# EAGLE board Powerboard v1 (EAGLE 9.4.2), part 1 of 3
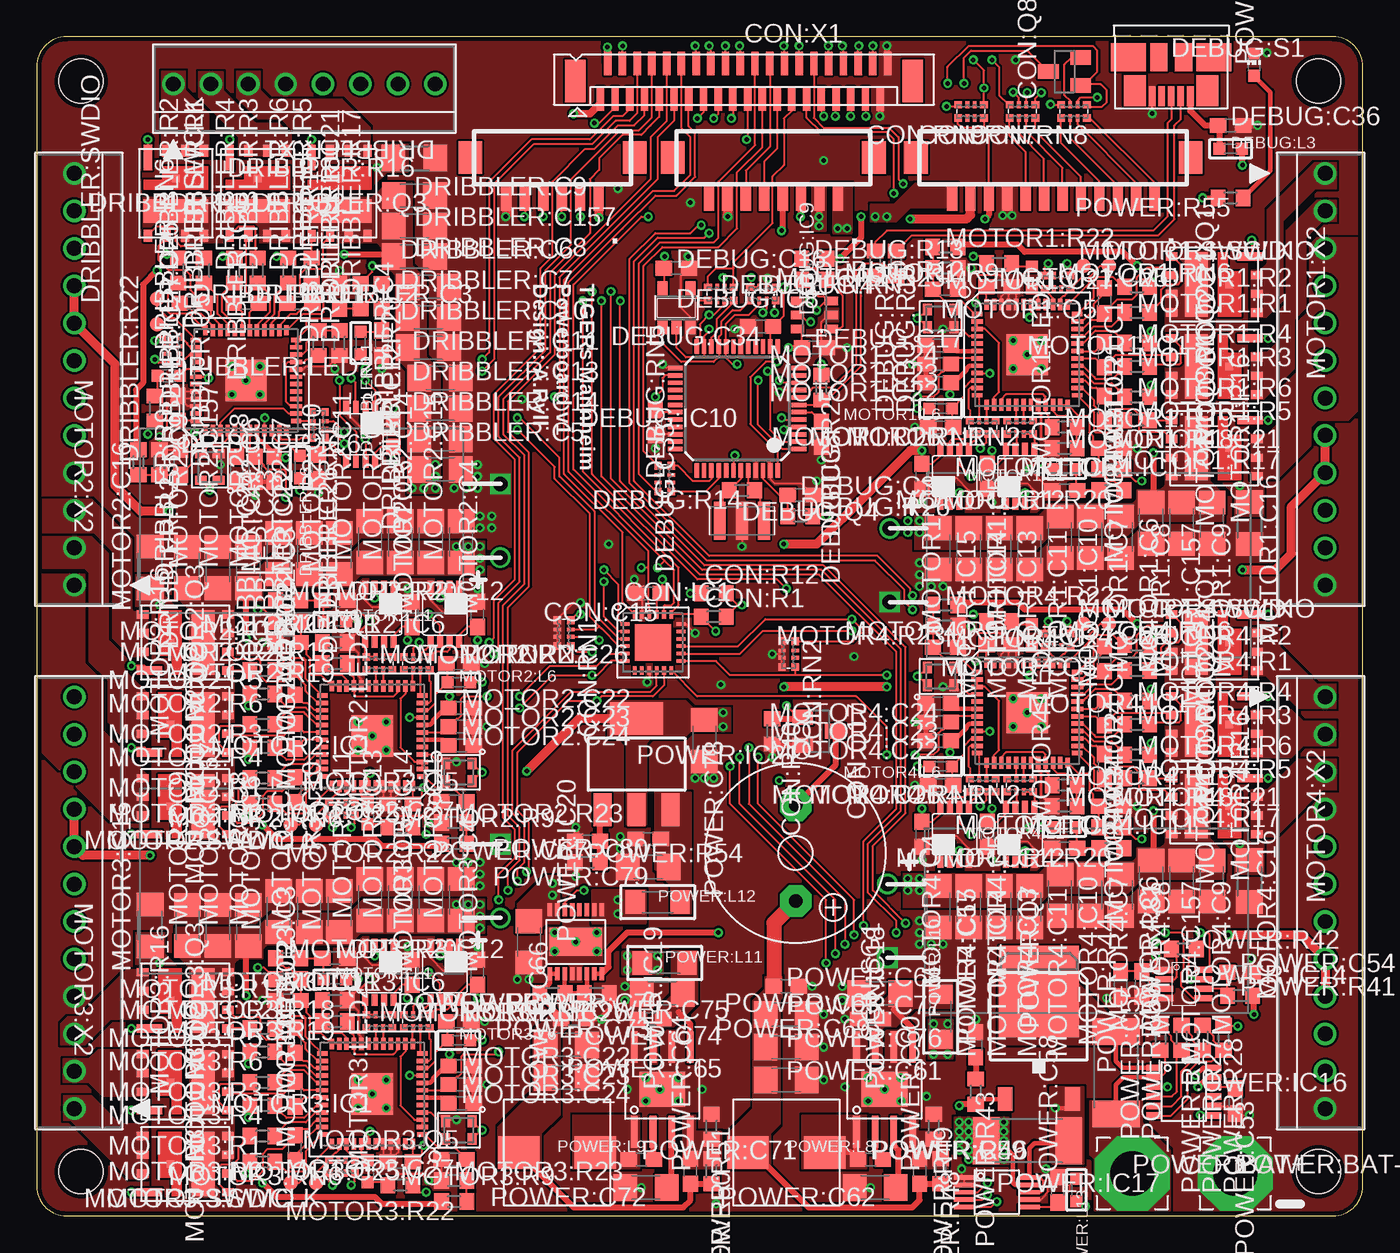
[diagram p0: board, top side]
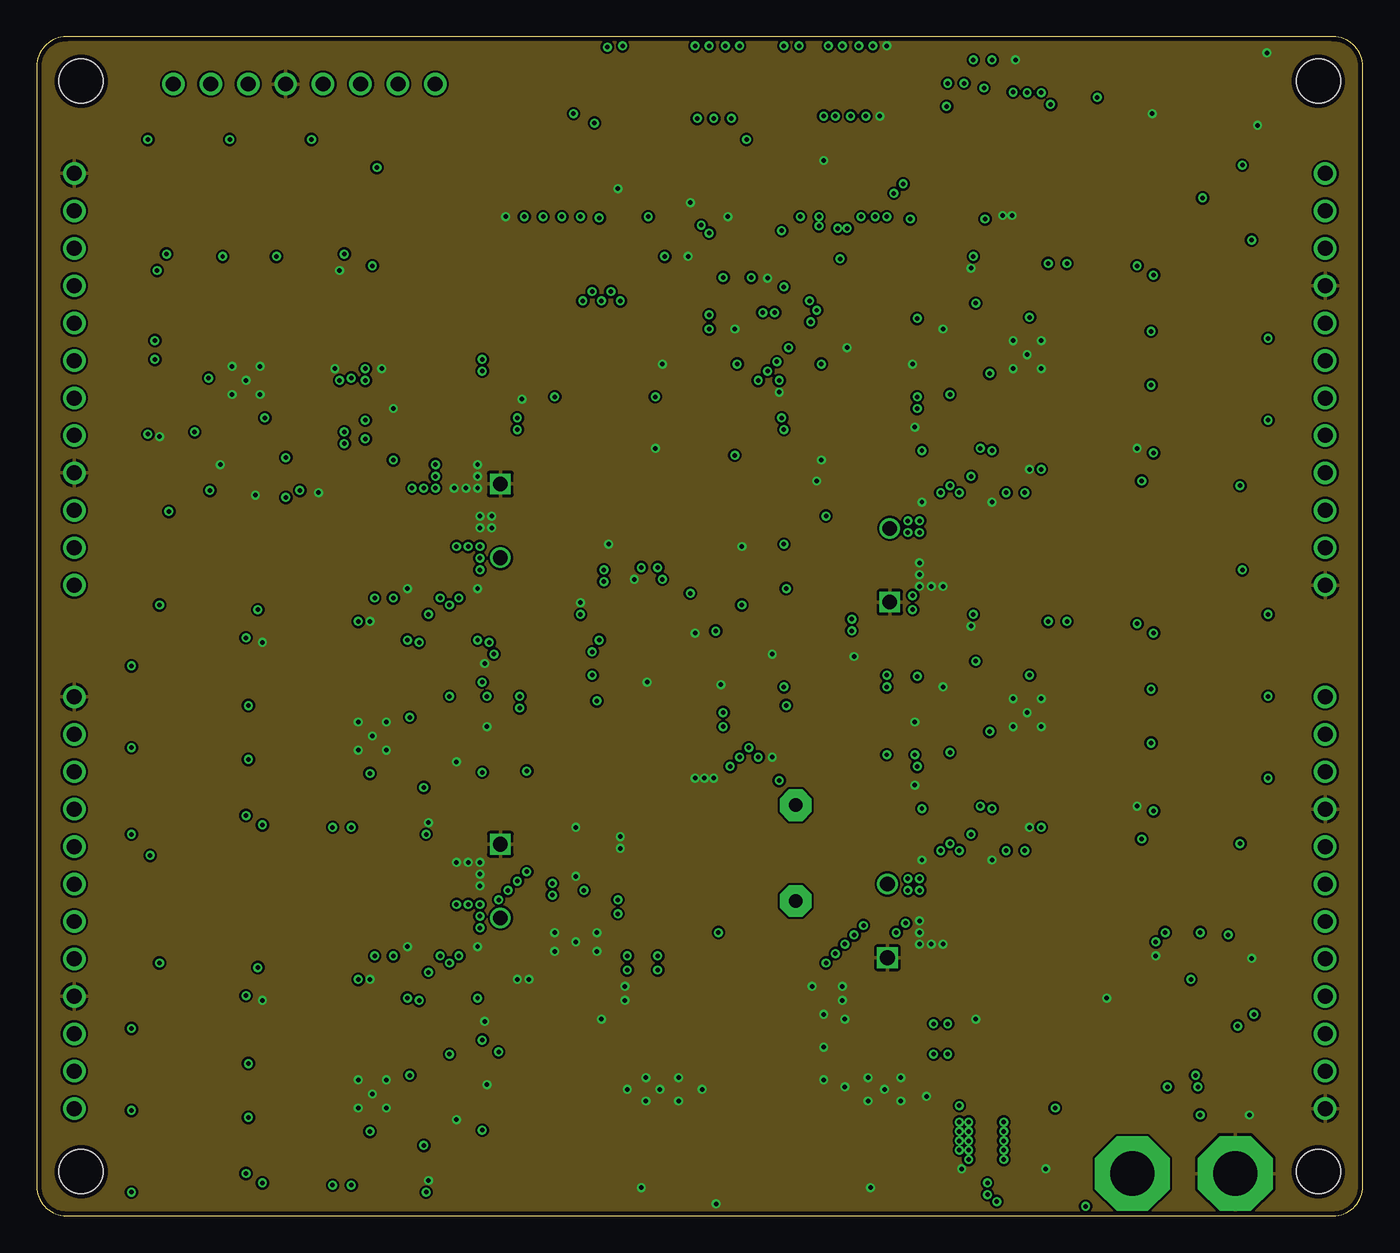
[diagram p1: board, inner layer GND]
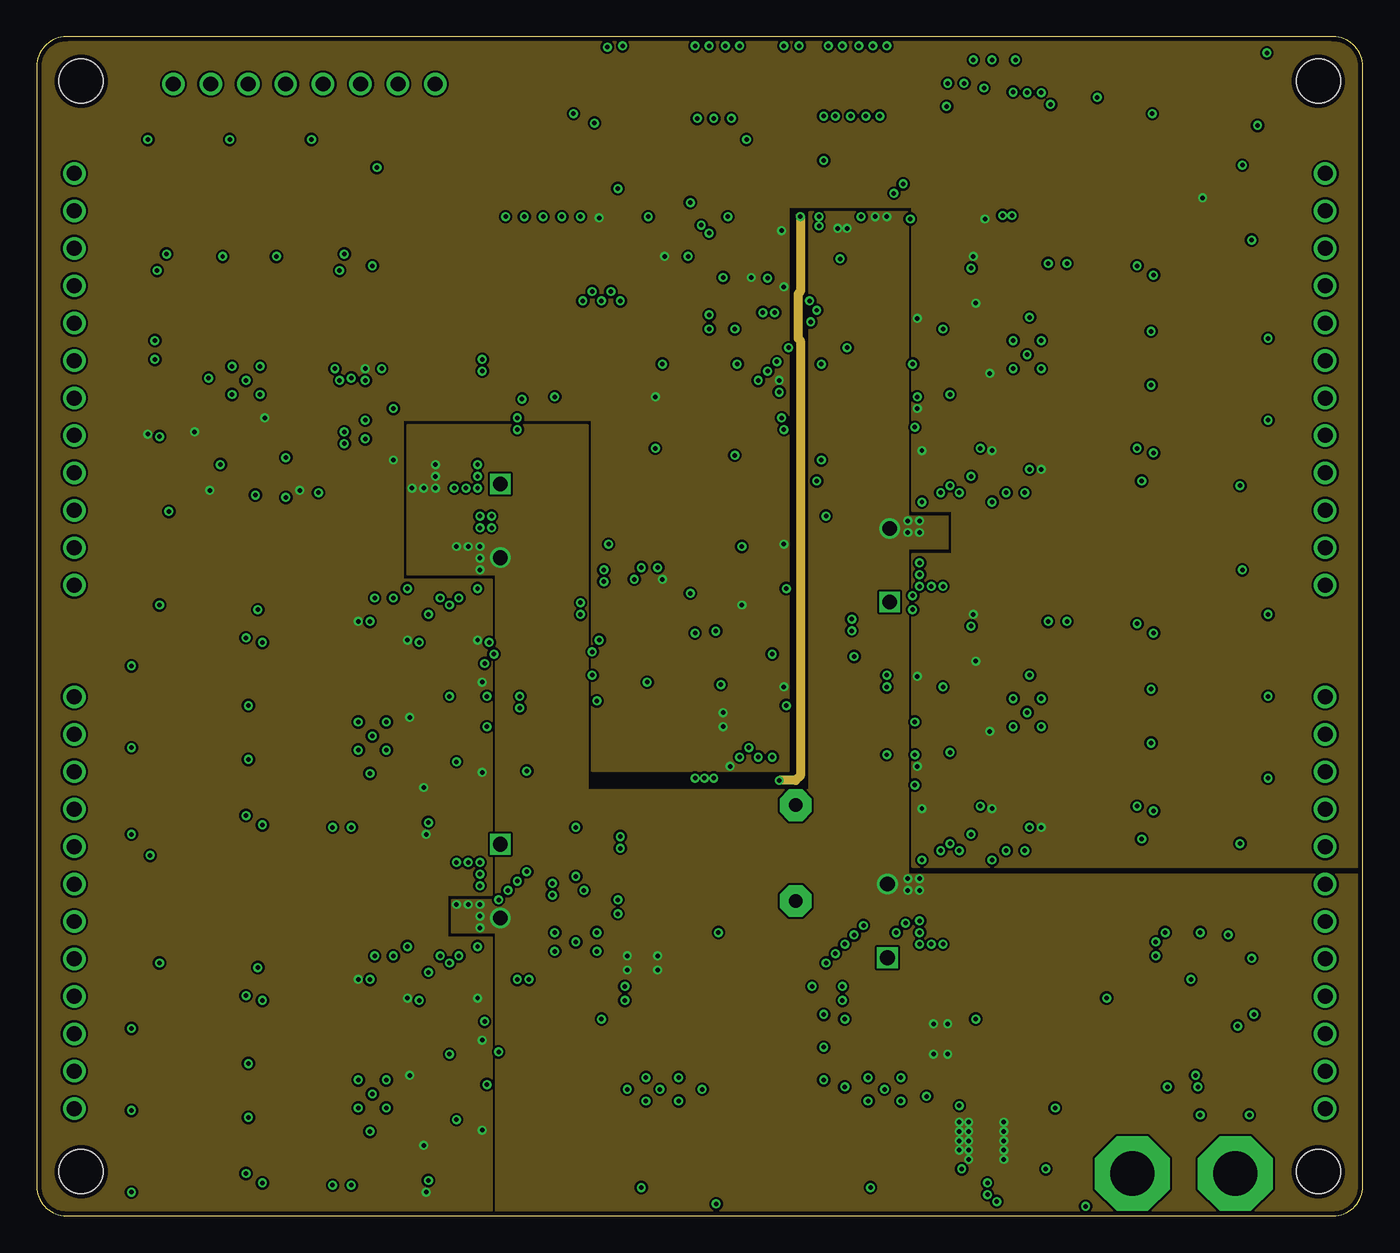
[diagram p2: board, inner layer PWR]
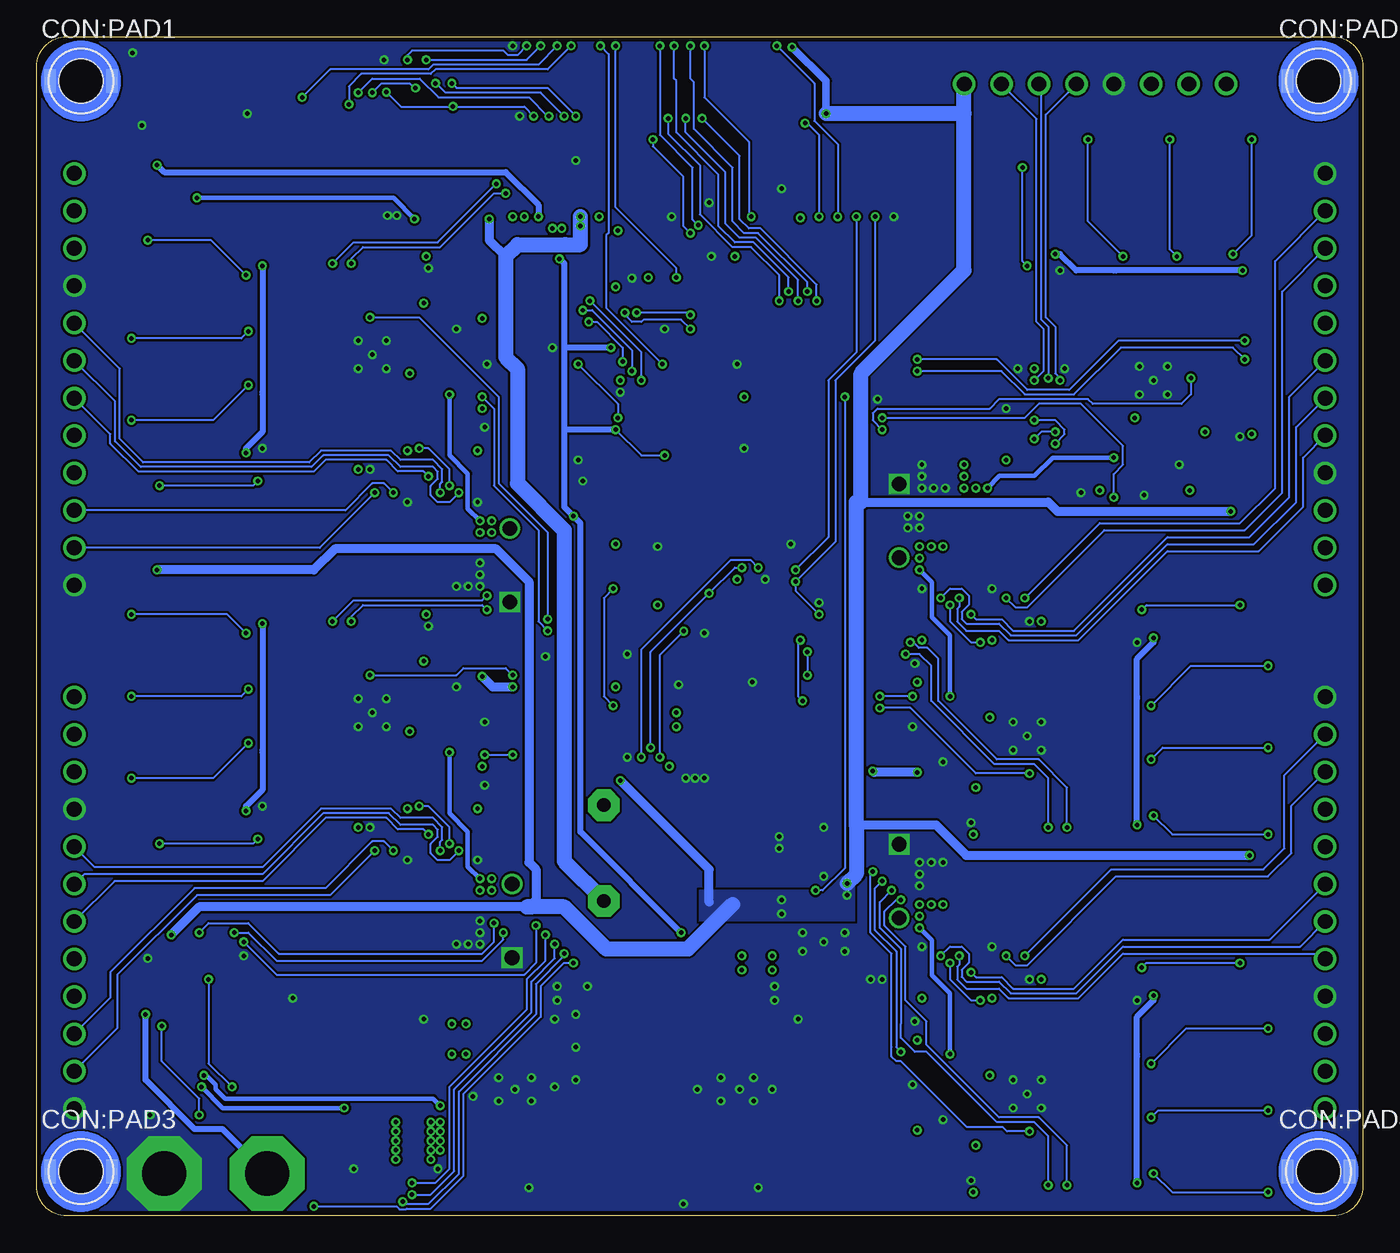
[diagram p3: board, bottom side, seen from below]

Size 90 x 80 mm. Coordinates in mm from the lower left corner, seen from the top.
Outline: 2,0 88,0 arc90 90,2 90,78 arc90 88,80 2,80 arc90 0,78 0,2 arc90 2,0
Copper layers (1+2*15+16): Top 0.035mm / dielectric 0.38mm / GND 0.035mm / dielectric 0.71mm / PWR 0.035mm / dielectric 0.38mm / Bottom 0.035mm
Design rules "PCB-POOL Standard_ML4 *": minimum track width 0.15mm, minimum drill 0.3mm, track to track 0.15mm, track to pad 0.15mm, pad to pad 0.15mm, via to via 0.15mm, smd to smd 0.15mm, copper to edge 0.3mm, drill to drill 0.2mm, minimum pad ring 0.2mm, minimum via ring 0.15mm, stop-mask expansion 0.075mm, vias tented up to drill 14mil, thermal gap 0.2mm

## Footprints (pad centres in the part's own frame; a part is rotated, then mirrored left to right if it is on the bottom)
C0603 = smd 1.1 x 1: 1 -0.85,0; 2 0.85,0
DF13C-8P-1.25V = smd 1.6 x 2.2: M$0 6.825,-1.8; M$1 -6.825,-1.8 | smd 0.7 x 1.8: P$1 -4.375,0.9; P$2 -3.125,0.9; P$3 -1.875,0.9; P$4 -0.625,0.9; P$5 0.625,0.9; P$6 1.875,0.9; P$7 3.125,0.9; P$8 4.375,0.9
WQFN24 = smd 0.6 x 0.24: 1 -1.9,1.25; 2 -1.9,0.75; 3 -1.9,0.25; 4 -1.9,-0.25; 5 -1.9,-0.75; 6 -1.9,-1.25; 13 1.9,-1.25; 14 1.9,-0.75; 15 1.9,-0.25; 16 1.9,0.25; 17 1.9,0.75; 18 1.9,1.25 | smd 0.24 x 0.6: 7 -1.25,-1.9; 8 -0.75,-1.9; 9 -0.25,-1.9; 10 0.25,-1.9; 11 0.75,-1.9; 12 1.25,-1.9; 19 1.25,1.9; 20 0.75,1.9; 21 0.25,1.9; 22 -0.25,1.9; 23 -0.75,1.9; 24 -1.25,1.9 | smd 2.45 x 2.45: PAD 0,0
DF13C-6P-1.25V = smd 1.6 x 2.2: M$0 5.575,-1.8; M$1 -5.575,-1.8 | smd 0.7 x 1.8: P$1 -3.125,0.9; P$2 -1.875,0.9; P$3 -0.625,0.9; P$4 0.625,0.9; P$5 1.875,0.9; P$6 3.125,0.9
DF13C-12P-1.25V = smd 1.6 x 2.2: M$0 9.325,-1.8; M$1 -9.325,-1.8 | smd 0.7 x 1.8: P$1 -6.875,0.9; P$2 -5.625,0.9; P$3 -4.375,0.9; P$4 -3.125,0.9; P$5 -1.875,0.9; P$6 -0.625,0.9; P$7 0.625,0.9; P$8 1.875,0.9; P$9 3.125,0.9; P$10 4.375,0.9; P$11 5.625,0.9; P$12 6.875,0.9
5,4/3,0 = smd 0.8 x 1.6: 1 -2.1,0; 2 2.1,0 | hole 3: 0,0
SOT23 = smd 1 x 1.4: 1 -0.95,-1.1; 2 0.95,-1.1; 3 0,1.1
R0603 = smd 1 x 1.1: 1 -0.85,0; 2 0.85,0
EXB28V = smd 0.525 x 0.5: 1 -0.875,-0.45; 4 0.875,-0.45; 5 0.875,0.45; 8 -0.875,0.45 | smd 0.25 x 0.5: 2 -0.25,-0.45; 3 0.25,-0.45; 6 0.25,0.45; 7 -0.25,0.45
F/QMX = drill 0.914 pad 2.159 octagon: + 3.251,0; - -3.251,0
TE-4-1734742-0 = smd 0.5 x 1.6: 1 -9.75,-1.2; 2 -9.25,1.2; 3 -8.75,-1.2; 4 -8.25,1.2; 5 -7.75,-1.2; 6 -7.25,1.2; 7 -6.75,-1.2; 8 -6.25,1.2; 9 -5.75,-1.2; 10 -5.25,1.2; 11 -4.75,-1.2; 12 -4.25,1.2; 13 -3.75,-1.2; 14 -3.25,1.2; 15 -2.75,-1.2; 16 -2.25,1.2; 17 -1.75,-1.2; 18 -1.25,1.2; 19 -0.75,-1.2; 20 -0.25,1.2; 21 0.25,-1.2; 22 0.75,1.2; 23 1.25,-1.2; 24 1.75,1.2; 25 2.25,-1.2; 26 2.75,1.2; 27 3.25,-1.2; 28 3.75,1.2; 29 4.25,-1.2; 30 4.75,1.2; 31 5.25,-1.2; 32 5.75,1.2; 33 6.25,-1.2; 34 6.75,1.2; 35 7.25,-1.2; 36 7.75,1.2; 37 8.25,-1.2; 38 8.75,1.2; 39 9.25,-1.2; 40 9.75,1.2 | smd 1.4 x 2.9: P1 -11.45,0; P2 11.45,0
SOT23-5 = smd 0.69 x 0.99: 1 -0.95,-1.29; 2 0,-1.29; 3 0.95,-1.29; 4 0.95,1.3; 5 -0.95,1.3
SOT23-6 = smd 0.6 x 0.9: 1 -0.95,-1.15; 2 0,-1.15; 3 0.95,-1.15; 4 0.95,1.15; 5 0,1.15; 6 -0.95,1.15
LQFP48-ST = smd 1 x 0.3: 1 -4.2,2.75; 2 -4.2,2.25; 3 -4.2,1.75; 4 -4.2,1.25; 5 -4.2,0.75; 6 -4.2,0.25; 7 -4.2,-0.25; 8 -4.2,-0.75; 9 -4.2,-1.25; 10 -4.2,-1.75; 11 -4.2,-2.25; 12 -4.2,-2.75; 25 4.2,-2.75; 26 4.2,-2.25; 27 4.2,-1.75; 28 4.2,-1.25; 29 4.2,-0.75; 30 4.2,-0.25; 31 4.2,0.25; 32 4.2,0.75; 33 4.2,1.25; 34 4.2,1.75; 35 4.2,2.25; 36 4.2,2.75 | smd 0.3 x 1: 13 -2.75,-4.2; 14 -2.25,-4.2; 15 -1.75,-4.2; 16 -1.25,-4.2; 17 -0.75,-4.2; 18 -0.25,-4.2; 19 0.25,-4.2; 20 0.75,-4.2; 21 1.25,-4.2; 22 1.75,-4.2; 23 2.25,-4.2; 24 2.75,-4.2; 37 2.75,4.2; 38 2.25,4.2; 39 1.75,4.2; 40 1.25,4.2; 41 0.75,4.2; 42 0.25,4.2; 43 -0.25,4.2; 44 -0.75,4.2; 45 -1.25,4.2; 46 -1.75,4.2; 47 -2.25,4.2; 48 -2.75,4.2
L0603 = smd 0.8 x 0.8: 1 -0.762,0; 2 0.762,0
CSTCR6M = smd 0.8 x 2.6: 1 -1.5,0; 2 0,0; 3 1.5,0
USB-BMICRO = smd 0.45 x 1.38: 1 1.3,-2.66; 2 0.65,-2.66; 3 0,-2.66; 4 -0.65,-2.66; 5 -1.3,-2.66 | smd 1.175 x 1.9: P$1 0.838,0; P$2 -0.838,0 | smd 2.375 x 1.9: P$3 2.913,0; P$4 -2.913,0 | smd 1.475 x 2.1: P$5 -2.462,-2.3; P$6 2.462,-2.3
C1206 = smd 1.6 x 1.8: 1 -1.4,0; 2 1.4,0
VFQFPN48 = smd 0.7 x 0.3: 1 -3.4,2.75; 12 -3.4,-2.75; 25 3.4,-2.75; 36 3.4,2.75 | smd 0.8 x 0.3: 2 -3.4,2.25; 3 -3.4,1.75; 4 -3.4,1.25; 5 -3.4,0.75; 6 -3.4,0.25; 7 -3.4,-0.25; 8 -3.4,-0.75; 9 -3.4,-1.25; 10 -3.4,-1.75; 11 -3.4,-2.25; 26 3.4,-2.25; 27 3.4,-1.75; 28 3.4,-1.25; 29 3.4,-0.75; 30 3.4,-0.25; 31 3.4,0.25; 32 3.4,0.75; 33 3.4,1.25; 34 3.4,1.75; 35 3.4,2.25 | smd 0.3 x 0.7: 13 -2.75,-3.4; 24 2.75,-3.4; 37 2.75,3.4; 48 -2.75,3.4 | smd 0.3 x 0.8: 14 -2.25,-3.4; 15 -1.75,-3.4; 16 -1.25,-3.4; 17 -0.75,-3.4; 18 -0.25,-3.4; 19 0.25,-3.4; 20 0.75,-3.4; 21 1.25,-3.4; 22 1.75,-3.4; 23 2.25,-3.4; 38 2.25,3.4; 39 1.75,3.4; 40 1.25,3.4; 41 0.75,3.4; 42 0.25,3.4; 43 -0.25,3.4; 44 -0.75,3.4; 45 -1.25,3.4; 46 -1.75,3.4; 47 -2.25,3.4 | smd 2.8 x 2.8: PAD 0,0
DCT_R-PDSO-G8 = smd 0.4 x 0.8: 1 -0.975,-1.875; 2 -0.325,-1.875; 3 0.325,-1.875; 4 0.975,-1.875; 5 0.975,1.875; 6 0.325,1.875; 7 -0.325,1.875; 8 -0.975,1.875
CHIP-LED0603 = smd 0.8 x 0.8: A 0,-0.75; C 0,0.75
POWER56_HBRIDGE = smd 0.56 x 0.81: 1 1.905,2.895; 2 0.635,2.895; 3 -0.635,2.895; 4 -1.905,2.895; 5 -1.905,-2.895; 6 -0.635,-2.895; 7 0.635,-2.895 | smd 0.56 x 1.74: 8 1.905,-2.43 | smd 4.37 x 1.58: D1 0,1.21 | smd 0.5 x 0.5: S2 0,-1
OSCI-KC2016 = smd 0.6 x 0.8: 1 -0.9,-0.6; 2 0.9,-0.6; 3 0.9,0.6; 4 -0.9,0.6
R1206 = smd 1.6 x 1.803: 1 -1.422,0; 2 1.422,0
TP10R = smd 1 x 1: TP 0,0
640454-8 = drill 1.016 pad 1.524: 1 8.89,0; 2 6.35,0; 3 3.81,0; 4 1.27,0; 5 -1.27,0; 6 -3.81,0; 7 -6.35,0; 8 -8.89,0
C22-12.5L = drill 1: + -2.5,-2.5 | drill 1 square: - 2.5,-2.5
1-640454-2 = drill 1.016 pad 1.524: 1 13.97,0; 2 11.43,0; 3 8.89,0; 4 6.35,0; 5 3.81,0; 6 1.27,0; 7 -1.27,0; 8 -3.81,0; 9 -6.35,0; 10 -8.89,0; 11 -11.43,0; 12 -13.97,0
5,08/3 = drill 3 pad 5.08 octagon: P$1 0,0
SOT23-8 = smd 1.22 x 0.4: 1 -1.31,0.975; 2 -1.31,0.325; 3 -1.31,-0.325; 4 -1.31,-0.975; 5 1.31,-0.975; 6 1.31,-0.325; 7 1.31,0.325; 8 1.31,0.975
MSOP-12 = smd 0.42 x 0.95: 1 -1.625,-2.075; 2 -0.975,-2.075; 3 -0.325,-2.075; 4 0.325,-2.075; 5 0.975,-2.075; 6 1.625,-2.075; 7 1.625,2.075; 8 0.975,2.075; 9 0.325,2.075; 10 -0.325,2.075; 11 -0.975,2.075; 12 -1.625,2.075
DGS_S-PDSO-G10 = smd 0.3 x 1.45: 1 -1,-2.2; 2 -0.5,-2.2; 3 0,-2.2; 4 0.5,-2.2; 5 1,-2.2; 6 1,2.2; 7 0.5,2.2; 8 0,2.2; 9 -0.5,2.2; 10 -1,2.2
DDA_R-PDSO-G8 = smd 0.45 x 2.15: 1 -1.905,-2.875; 2 -0.635,-2.875; 3 0.635,-2.875; 4 1.905,-2.875; 5 1.905,2.875; 6 0.635,2.875; 7 -0.635,2.875; 8 -1.905,2.875 | smd 3.1 x 2.4: PAD 0,0
MSOP-16P = smd 0.305 x 0.89: 1 -1.75,-2.17; 2 -1.25,-2.17; 3 -0.75,-2.17; 4 -0.25,-2.17; 5 0.25,-2.17; 6 0.75,-2.17; 7 1.25,-2.17; 8 1.75,-2.17; 9 1.75,2.17; 10 1.25,2.17; 11 0.75,2.17; 12 0.25,2.17; 13 -0.25,2.17; 14 -0.75,2.17; 15 -1.25,2.17; 16 -1.75,2.17 | smd 3.545 x 1.891: PAD 0,0
SOT223 = smd 1.219 x 2.235: 1 -2.311,-3.099; 2 0,-3.099; 3 2.311,-3.099 | smd 3.6 x 2.2: 4 0,3.099
WE-HCI = smd 2.8 x 2.2: 1 -2.6,0; 2 2.6,0
L1206 = smd 1.3 x 1.6: 1 -1.524,0; 2 1.524,0
D-PAK_TO252AA = smd 1 x 1.6: 1 -2.28,-4.8; 3 2.28,-4.8 | smd 5.4 x 6.2: 4 0,2.5
R2512 = smd 1.8 x 3.2: 1 -2.8,0; 2 2.8,0

## Placement (x,y rotation side)
CON:C15  100n  [C0603]  41.51,42.24 180 top
CON:EXT  DF13-8P-1.25V  [DF13C-8P-1.25V]  50,70 180 top
CON:IC1  TCA9539RTW  [WQFN24]  41.83,38.91 0 top
CON:IR  DF13-6P-1.25V  [DF13C-6P-1.25V]  35,70 180 top
CON:KD  DF13-12P-1.25V  [DF13C-12P-1.25V]  69,70 180 top
CON:PAD1  [5,4/3,0]  87,77 0 bottom
CON:PAD2  [5,4/3,0]  3,77 0 bottom
CON:PAD3  [5,4/3,0]  87,3 0 bottom
CON:PAD4  9774030243R  [5,4/3,0]  3,3 0 bottom
CON:Q8  BSS84  [SOT23]  69.77,77.64 90 top
CON:Q17  BSS138  [SOT23]  53.1,32.87 270 top
CON:R1  1k33 1%  [R0603]  45.95,40.65 0 top
CON:R12  1k33 1%  [R0603]  45.95,42.24 0 top
CON:R40  5k6  [R0603]  49.92,32.87 270 top
CON:RN1  10k  [EXB28V]  35.79,39.54 270 top
CON:RN2  10k  [EXB28V]  51.03,38.11 270 top
CON:RN7  100  [EXB28V]  66.91,74.94 180 top
CON:RN8  100  [EXB28V]  70.4,74.94 180 top
CON:RN9  10k  [EXB28V]  63.41,74.94 180 top
CON:SG1  CEM-1212S  [F/QMX]  51.51,24.62 270 top
CON:X1  4-1734742-0  [TE-4-1734742-0]  48,77 0 top
DEBUG:C16  100n  [C0603]  43.41,64.31 0 top
DEBUG:C17  100n  [C0603]  52.78,58.91 0 top
DEBUG:C34  100n  [C0603]  49.13,60.34 180 top
DEBUG:C35  100n  [C0603]  41.98,53.83 270 top
DEBUG:C36  100n  [C0603]  81.04,73.99 0 top
DEBUG:C37  100n  [C0603]  51.83,48.91 0 top
DEBUG:C38  100n  [C0603]  53.26,53.03 270 top
DEBUG:IC8  74LVC1G125DBV  [SOT23-5]  43.41,61.61 0 top
DEBUG:IC9  93C76B  [SOT23-6]  52.78,61.13 90 top
DEBUG:IC10  FT2232ST  [LQFP48-ST]  47.54,54.78 180 top
DEBUG:L3  120R  [L0603]  81.04,72.4 0 top
DEBUG:Q4  CSTCR6M00G55-R0  [CSTCR6M]  47.86,47.16 0 top
DEBUG:R12  1k  [R0603]  52.78,63.51 0 top
DEBUG:R13  5k6  [R0603]  52.78,64.94 0 top
DEBUG:R14  1M  [R0603]  47.86,49.22 180 top
DEBUG:R15  33  [R0603]  58.34,64.62 270 top
DEBUG:R24  33  [R0603]  56.91,64.62 270 top
DEBUG:R25  1k33 1%  [R0603]  53.26,56.21 270 top
DEBUG:R26  1k  [R0603]  51.83,47.48 0 top
DEBUG:RN3  10k  [EXB28V]  49.29,62.56 0 top
DEBUG:RN4  100  [EXB28V]  46.43,62.56 0 top
DEBUG:RN5  100  [EXB28V]  42.62,50.02 90 top
DEBUG:S1  USB-BU  [USB-BMICRO]  77,78.63 0 top
DRIBBLER:C1  100n  [C0603]  10.55,61.92 0 top
DRIBBLER:C2  100n  [C0603]  14.2,61.92 0 top
DRIBBLER:C3  100n  [C0603]  17.85,61.92 0 top
DRIBBLER:C4  100n  [C0603]  24.2,53.03 90 top
DRIBBLER:C5  10u  [C1206]  27.38,50.65 0 top
DRIBBLER:C6  10u  [C1206]  26.59,63.03 0 top
DRIBBLER:C7  10u  [C1206]  26.59,60.97 0 top
DRIBBLER:C8  10u  [C1206]  25.63,65.1 0 top
DRIBBLER:C9  10u  [C1206]  25.63,69.23 0 top
DRIBBLER:C10  10u  [C1206]  26.59,58.91 0 top
DRIBBLER:C11  10u  [C1206]  27.38,56.84 0 top
DRIBBLER:C12  100n  [C0603]  23.41,59.23 270 top
DRIBBLER:C13  10u  [C1206]  27.38,54.78 0 top
DRIBBLER:C14  10u  [C1206]  27.38,52.72 0 top
DRIBBLER:C21  47p  [C0603]  20.55,62.4 90 top
DRIBBLER:C22  1u  [C0603]  16.11,50.65 270 top
DRIBBLER:C23  100n  [C0603]  14.84,50.65 270 top
DRIBBLER:C24  1u  [C0603]  13.57,50.65 270 top
DRIBBLER:C25  100n  [C0603]  9.6,54.78 90 top
DRIBBLER:C26  100n  [C0603]  19.12,50.81 270 top
DRIBBLER:C27  1u  [C0603]  9.76,51.13 90 top
DRIBBLER:C157  10u  [C1206]  25.63,67.16 0 top
DRIBBLER:IC1  STSPIN32F0A  [VFQFPN48]  14.2,56.69 90 top
DRIBBLER:IC6  SN74LVC3G17DCT  [DCT_R-PDSO-G8]  21.98,53.03 180 top
DRIBBLER:L1  120R  [L0603]  21.98,59.23 270 top
DRIBBLER:L6  120R  [L0603]  17.85,50.81 270 top
DRIBBLER:LED2  gr  [CHIP-LED0603]  8.96,57 270 top
DRIBBLER:Q1  FDMD85100  [POWER56_HBRIDGE]  9.44,69.38 180 top
DRIBBLER:Q2  FDMD85100  [POWER56_HBRIDGE]  15,69.38 180 top
DRIBBLER:Q3  FDMD85100  [POWER56_HBRIDGE]  20.55,69.38 180 top
DRIBBLER:Q5  KC2016K4.00000C1GE00  [OSCI-KC2016]  11.74,50.81 90 top
DRIBBLER:R1  33  [R0603]  11.34,64.15 90 top
DRIBBLER:R2  33  [R0603]  9.6,64.15 90 top
DRIBBLER:R3  33  [R0603]  15,64.15 90 top
DRIBBLER:R4  33  [R0603]  13.41,64.15 90 top
DRIBBLER:R5  33  [R0603]  18.65,64.15 90 top
DRIBBLER:R6  33  [R0603]  17.06,64.15 90 top
DRIBBLER:R9  1k  [R0603]  8.01,54.78 270 top
DRIBBLER:R16  0R025  [R1206]  25.63,71.77 180 top
DRIBBLER:R17  1k33 1%  [R0603]  21.98,62.4 90 top
DRIBBLER:R18  1k33 1%  [R0603]  20.55,59.23 90 top
DRIBBLER:R19  7k32 1%  [R0603]  19.12,59.23 90 top
DRIBBLER:R20  16k2 1%  [R0603]  23.41,62.4 270 top
DRIBBLER:R22  243k 1%  [R0603]  6.9,51.13 90 top
DRIBBLER:R23  24k 1%  [R0603]  8.33,51.13 270 top
DRIBBLER:RN1  100  [EXB28V]  19.12,53.67 270 top
DRIBBLER:RN6  100  [EXB28V]  9.28,58.75 90 top
DRIBBLER:SWCLK  TPTP10R  [TP10R]  8.17,60.5 90 top
DRIBBLER:SWDIO  TPTP10R  [TP10R]  8.17,62.24 90 top
DRIBBLER:X1  640454-8  [640454-8]  18.16,76.8 180 top
MOTOR1:C1  100n  [C0603]  72.46,62.08 270 top
MOTOR1:C2  100n  [C0603]  72.46,58.43 270 top
MOTOR1:C3  100n  [C0603]  72.46,54.78 270 top
MOTOR1:C4  100n  [C0603]  60.08,50.18 270 top
MOTOR1:C5  100n  [C0603]  64.53,50.18 270 top
MOTOR1:C6  10u  [C1206]  73.58,46.05 270 top
MOTOR1:C7  10u  [C1206]  71.51,46.05 270 top
MOTOR1:C8  10u  [C1206]  75.64,47 270 top
MOTOR1:C9  10u  [C1206]  79.77,47 270 top
MOTOR1:C10  10u  [C1206]  69.45,46.05 270 top
MOTOR1:C11  10u  [C1206]  67.38,45.26 270 top
MOTOR1:C12  100n  [C0603]  69.77,49.22 180 top
MOTOR1:C13  10u  [C1206]  65.32,45.26 270 top
MOTOR1:C14  10u  [C1206]  63.26,45.26 270 top
MOTOR1:C15  10u  [C1206]  61.19,45.26 270 top
MOTOR1:C16  470u  [C22-12.5L]  60.4,44.14 270 top
MOTOR1:C21  47p  [C0603]  72.94,52.08 0 top
MOTOR1:C22  1u  [C0603]  61.19,56.53 180 top
MOTOR1:C23  100n  [C0603]  61.19,57.8 180 top
MOTOR1:C24  1u  [C0603]  61.19,59.07 180 top
MOTOR1:C25  100n  [C0603]  65.32,63.03 0 top
MOTOR1:C26  100n  [C0603]  61.35,53.51 180 top
MOTOR1:C27  1u  [C0603]  61.67,62.88 0 top
MOTOR1:C157  10u  [C1206]  77.7,47 270 top
MOTOR1:IC1  STSPIN32F0A  [VFQFPN48]  67.22,58.43 0 top
MOTOR1:IC6  SN74LVC3G17DCT  [DCT_R-PDSO-G8]  62.3,50.18 0 top
MOTOR1:IC11  SN74LVC3G17DCT  [DCT_R-PDSO-G8]  66.75,50.18 0 top
MOTOR1:L1  120R  [L0603]  69.77,50.65 180 top
MOTOR1:L6  120R  [L0603]  61.35,54.78 180 top
MOTOR1:LED2  gr  [CHIP-LED0603]  67.54,63.67 180 top
MOTOR1:Q1  FDMD85100  [POWER56_HBRIDGE]  79.92,63.19 90 top
MOTOR1:Q2  FDMD85100  [POWER56_HBRIDGE]  79.92,57.64 90 top
MOTOR1:Q3  FDMD85100  [POWER56_HBRIDGE]  79.92,52.08 90 top
MOTOR1:Q5  KC2016K4.00000C1GE00  [OSCI-KC2016]  61.35,60.89 0 top
MOTOR1:R1  33  [R0603]  74.69,61.29 0 top
MOTOR1:R2  33  [R0603]  74.69,63.03 0 top
MOTOR1:R3  33  [R0603]  74.69,57.64 0 top
MOTOR1:R4  33  [R0603]  74.69,59.23 0 top
MOTOR1:R5  33  [R0603]  74.69,53.99 0 top
MOTOR1:R6  33  [R0603]  74.69,55.57 0 top
MOTOR1:R9  1k  [R0603]  65.32,64.62 180 top
MOTOR1:R16  0R025  [R1206]  82.31,47 90 top
MOTOR1:R17  1k33 1%  [R0603]  72.94,50.65 0 top
MOTOR1:R18  1k33 1%  [R0603]  69.77,52.08 0 top
MOTOR1:R19  7k32 1%  [R0603]  69.77,53.51 0 top
MOTOR1:R20  16k2 1%  [R0603]  72.94,49.22 180 top
MOTOR1:R22  243k 1%  [R0603]  61.67,65.73 0 top
MOTOR1:R23  24k 1%  [R0603]  61.67,64.31 180 top
MOTOR1:RN1  100  [EXB28V]  64.21,53.51 180 top
MOTOR1:RN2  100  [EXB28V]  66.75,53.51 180 top
MOTOR1:RN6  100  [EXB28V]  69.29,63.35 0 top
MOTOR1:SWCLK  TPTP10R  [TP10R]  71.03,64.46 0 top
MOTOR1:SWDIO  TPTP10R  [TP10R]  72.78,64.46 0 top
MOTOR1:X2  1-640454-2  [1-640454-2]  87.46,56.76 90 top
MOTOR2:C1  100n  [C0603]  17.54,28.9 90 top
MOTOR2:C2  100n  [C0603]  17.54,32.55 90 top
MOTOR2:C3  100n  [C0603]  17.54,36.21 90 top
MOTOR2:C4  100n  [C0603]  29.92,40.81 90 top
MOTOR2:C5  100n  [C0603]  25.47,40.81 90 top
MOTOR2:C6  10u  [C1206]  16.43,44.94 90 top
MOTOR2:C7  10u  [C1206]  18.49,44.94 90 top
MOTOR2:C8  10u  [C1206]  14.36,43.98 90 top
MOTOR2:C9  10u  [C1206]  10.23,43.98 90 top
MOTOR2:C10  10u  [C1206]  20.55,44.94 90 top
MOTOR2:C11  10u  [C1206]  22.62,45.73 90 top
MOTOR2:C12  100n  [C0603]  20.23,41.76 0 top
MOTOR2:C13  10u  [C1206]  24.68,45.73 90 top
MOTOR2:C14  10u  [C1206]  26.74,45.73 90 top
MOTOR2:C15  10u  [C1206]  28.81,45.73 90 top
MOTOR2:C16  470u  [C22-12.5L]  28.97,47.16 90 top
MOTOR2:C21  47p  [C0603]  17.06,38.91 180 top
MOTOR2:C22  1u  [C0603]  28.81,34.46 0 top
MOTOR2:C23  100n  [C0603]  28.81,33.19 0 top
MOTOR2:C24  1u  [C0603]  28.81,31.92 0 top
MOTOR2:C25  100n  [C0603]  24.68,27.95 180 top
MOTOR2:C26  100n  [C0603]  28.65,37.48 0 top
MOTOR2:C27  1u  [C0603]  28.33,28.11 180 top
MOTOR2:C157  10u  [C1206]  12.3,43.98 90 top
MOTOR2:IC1  STSPIN32F0A  [VFQFPN48]  22.77,32.55 180 top
MOTOR2:IC6  SN74LVC3G17DCT  [DCT_R-PDSO-G8]  27.7,40.81 180 top
MOTOR2:IC11  SN74LVC3G17DCT  [DCT_R-PDSO-G8]  23.25,40.81 180 top
MOTOR2:L1  120R  [L0603]  20.23,40.33 0 top
MOTOR2:L6  120R  [L0603]  28.65,36.21 0 top
MOTOR2:LED2  gr  [CHIP-LED0603]  22.46,27.32 0 top
MOTOR2:Q1  FDMD85100  [POWER56_HBRIDGE]  10.08,27.79 270 top
MOTOR2:Q2  FDMD85100  [POWER56_HBRIDGE]  10.08,33.35 270 top
MOTOR2:Q3  FDMD85100  [POWER56_HBRIDGE]  10.08,38.91 270 top
MOTOR2:Q5  KC2016K4.00000C1GE00  [OSCI-KC2016]  28.65,30.09 180 top
MOTOR2:R1  33  [R0603]  15.31,29.7 180 top
MOTOR2:R2  33  [R0603]  15.31,27.95 180 top
MOTOR2:R3  33  [R0603]  15.31,33.35 180 top
MOTOR2:R4  33  [R0603]  15.31,31.76 180 top
MOTOR2:R5  33  [R0603]  15.31,37 180 top
MOTOR2:R6  33  [R0603]  15.31,35.41 180 top
MOTOR2:R9  1k  [R0603]  24.68,26.36 0 top
MOTOR2:R16  0R025  [R1206]  7.69,43.98 270 top
MOTOR2:R17  1k33 1%  [R0603]  17.06,40.33 180 top
MOTOR2:R18  1k33 1%  [R0603]  20.23,38.91 180 top
MOTOR2:R19  7k32 1%  [R0603]  20.23,37.48 180 top
MOTOR2:R20  16k2 1%  [R0603]  17.06,41.76 0 top
MOTOR2:R22  243k 1%  [R0603]  28.33,25.25 180 top
MOTOR2:R23  24k 1%  [R0603]  28.33,26.68 0 top
MOTOR2:RN1  100  [EXB28V]  25.79,37.48 0 top
MOTOR2:RN2  100  [EXB28V]  23.25,37.48 0 top
MOTOR2:RN6  100  [EXB28V]  20.71,27.63 180 top
MOTOR2:SWCLK  TPTP10R  [TP10R]  18.96,26.52 180 top
MOTOR2:SWDIO  TPTP10R  [TP10R]  17.22,26.52 180 top
MOTOR2:X2  1-640454-2  [1-640454-2]  2.54,56.76 270 top
MOTOR3:C1  100n  [C0603]  17.54,4.62 90 top
MOTOR3:C2  100n  [C0603]  17.54,8.27 90 top
MOTOR3:C3  100n  [C0603]  17.54,11.92 90 top
MOTOR3:C4  100n  [C0603]  29.92,16.52 90 top
MOTOR3:C5  100n  [C0603]  25.47,16.52 90 top
MOTOR3:C6  10u  [C1206]  16.43,20.65 90 top
MOTOR3:C7  10u  [C1206]  18.49,20.65 90 top
MOTOR3:C8  10u  [C1206]  14.36,19.7 90 top
MOTOR3:C9  10u  [C1206]  10.23,19.7 90 top
MOTOR3:C10  10u  [C1206]  20.55,20.65 90 top
MOTOR3:C11  10u  [C1206]  22.62,21.44 90 top
MOTOR3:C12  100n  [C0603]  20.23,17.47 0 top
MOTOR3:C13  10u  [C1206]  24.68,21.44 90 top
MOTOR3:C14  10u  [C1206]  26.74,21.44 90 top
MOTOR3:C15  10u  [C1206]  28.81,21.44 90 top
MOTOR3:C16  470u  [C22-12.5L]  28.97,22.71 90 top
MOTOR3:C21  47p  [C0603]  17.06,14.62 180 top
MOTOR3:C22  1u  [C0603]  28.81,10.17 0 top
MOTOR3:C23  100n  [C0603]  28.81,8.9 0 top
MOTOR3:C24  1u  [C0603]  28.81,7.63 0 top
MOTOR3:C25  100n  [C0603]  24.68,3.66 180 top
MOTOR3:C26  100n  [C0603]  28.65,13.19 0 top
MOTOR3:C27  1u  [C0603]  28.33,3.82 180 top
MOTOR3:C157  10u  [C1206]  12.3,19.7 90 top
MOTOR3:IC1  STSPIN32F0A  [VFQFPN48]  22.77,8.27 180 top
MOTOR3:IC6  SN74LVC3G17DCT  [DCT_R-PDSO-G8]  27.7,16.52 180 top
MOTOR3:IC11  SN74LVC3G17DCT  [DCT_R-PDSO-G8]  23.25,16.52 180 top
MOTOR3:L1  120R  [L0603]  20.23,16.05 0 top
MOTOR3:L6  120R  [L0603]  28.65,11.92 0 top
MOTOR3:LED2  gr  [CHIP-LED0603]  22.46,3.03 0 top
MOTOR3:Q1  FDMD85100  [POWER56_HBRIDGE]  10.08,3.5 270 top
MOTOR3:Q2  FDMD85100  [POWER56_HBRIDGE]  10.08,9.06 270 top
MOTOR3:Q3  FDMD85100  [POWER56_HBRIDGE]  10.08,14.62 270 top
MOTOR3:Q5  KC2016K4.00000C1GE00  [OSCI-KC2016]  28.65,5.81 180 top
MOTOR3:R1  33  [R0603]  15.31,5.41 180 top
MOTOR3:R2  33  [R0603]  15.31,3.66 180 top
MOTOR3:R3  33  [R0603]  15.31,9.06 180 top
MOTOR3:R4  33  [R0603]  15.31,7.47 180 top
MOTOR3:R5  33  [R0603]  15.31,12.71 180 top
MOTOR3:R6  33  [R0603]  15.31,11.12 180 top
MOTOR3:R9  1k  [R0603]  24.68,2.08 0 top
MOTOR3:R16  0R025  [R1206]  7.69,19.7 270 top
MOTOR3:R17  1k33 1%  [R0603]  17.06,16.05 180 top
MOTOR3:R18  1k33 1%  [R0603]  20.23,14.62 180 top
MOTOR3:R19  7k32 1%  [R0603]  20.23,13.19 180 top
MOTOR3:R20  16k2 1%  [R0603]  17.06,17.47 0 top
MOTOR3:R22  243k 1%  [R0603]  28.33,0.96 180 top
MOTOR3:R23  24k 1%  [R0603]  28.33,2.39 0 top
MOTOR3:RN1  100  [EXB28V]  25.79,13.19 0 top
MOTOR3:RN2  100  [EXB28V]  23.25,13.19 0 top
MOTOR3:RN6  100  [EXB28V]  20.71,3.34 180 top
MOTOR3:SWCLK  TPTP10R  [TP10R]  18.96,2.23 180 top
MOTOR3:SWDIO  TPTP10R  [TP10R]  17.22,2.23 180 top
MOTOR3:X2  1-640454-2  [1-640454-2]  2.54,21.24 270 top
MOTOR4:C1  100n  [C0603]  72.46,37.79 270 top
MOTOR4:C2  100n  [C0603]  72.46,34.14 270 top
MOTOR4:C3  100n  [C0603]  72.46,30.49 270 top
MOTOR4:C4  100n  [C0603]  60.08,25.89 270 top
MOTOR4:C5  100n  [C0603]  64.53,25.89 270 top
MOTOR4:C6  10u  [C1206]  73.58,21.76 270 top
MOTOR4:C7  10u  [C1206]  71.51,21.76 270 top
MOTOR4:C8  10u  [C1206]  75.64,22.71 270 top
MOTOR4:C9  10u  [C1206]  79.77,22.71 270 top
MOTOR4:C10  10u  [C1206]  69.45,21.76 270 top
MOTOR4:C11  10u  [C1206]  67.38,20.97 270 top
MOTOR4:C12  100n  [C0603]  69.77,24.94 180 top
MOTOR4:C13  10u  [C1206]  65.32,20.97 270 top
MOTOR4:C14  10u  [C1206]  63.26,20.97 270 top
MOTOR4:C15  10u  [C1206]  61.19,20.97 270 top
MOTOR4:C16  470u  [C22-12.5L]  60.24,20.01 270 top
MOTOR4:C21  47p  [C0603]  72.94,27.79 0 top
MOTOR4:C22  1u  [C0603]  61.19,32.24 180 top
MOTOR4:C23  100n  [C0603]  61.19,33.51 180 top
MOTOR4:C24  1u  [C0603]  61.19,34.78 180 top
MOTOR4:C25  100n  [C0603]  65.32,38.75 0 top
MOTOR4:C26  100n  [C0603]  61.35,29.22 180 top
MOTOR4:C27  1u  [C0603]  61.67,38.59 0 top
MOTOR4:C157  10u  [C1206]  77.7,22.71 270 top
MOTOR4:IC1  STSPIN32F0A  [VFQFPN48]  67.22,34.14 0 top
MOTOR4:IC6  SN74LVC3G17DCT  [DCT_R-PDSO-G8]  62.3,25.89 0 top
MOTOR4:IC11  SN74LVC3G17DCT  [DCT_R-PDSO-G8]  66.75,25.89 0 top
MOTOR4:L1  120R  [L0603]  69.77,26.36 180 top
MOTOR4:L6  120R  [L0603]  61.35,30.49 180 top
MOTOR4:LED2  gr  [CHIP-LED0603]  67.54,39.38 180 top
MOTOR4:Q1  FDMD85100  [POWER56_HBRIDGE]  79.92,38.91 90 top
MOTOR4:Q2  FDMD85100  [POWER56_HBRIDGE]  79.92,33.35 90 top
MOTOR4:Q3  FDMD85100  [POWER56_HBRIDGE]  79.92,27.79 90 top
MOTOR4:Q5  KC2016K4.00000C1GE00  [OSCI-KC2016]  61.35,36.6 0 top
MOTOR4:R1  33  [R0603]  74.69,37 0 top
MOTOR4:R2  33  [R0603]  74.69,38.75 0 top
MOTOR4:R3  33  [R0603]  74.69,33.35 0 top
MOTOR4:R4  33  [R0603]  74.69,34.94 0 top
MOTOR4:R5  33  [R0603]  74.69,29.7 0 top
MOTOR4:R6  33  [R0603]  74.69,31.29 0 top
MOTOR4:R9  1k  [R0603]  65.32,40.33 180 top
MOTOR4:R16  0R025  [R1206]  82.31,22.71 90 top
MOTOR4:R17  1k33 1%  [R0603]  72.94,26.36 0 top
MOTOR4:R18  1k33 1%  [R0603]  69.77,27.79 0 top
MOTOR4:R19  7k32 1%  [R0603]  69.77,29.22 0 top
MOTOR4:R20  16k2 1%  [R0603]  72.94,24.94 180 top
MOTOR4:R22  243k 1%  [R0603]  61.67,41.45 0 top
MOTOR4:R23  24k 1%  [R0603]  61.67,40.02 180 top
MOTOR4:RN1  100  [EXB28V]  64.21,29.22 180 top
MOTOR4:RN2  100  [EXB28V]  66.75,29.22 180 top
MOTOR4:RN6  100  [EXB28V]  69.29,39.06 0 top
MOTOR4:SWCLK  TPTP10R  [TP10R]  71.03,40.17 0 top
MOTOR4:SWDIO  TPTP10R  [TP10R]  72.78,40.17 0 top
MOTOR4:X2  1-640454-2  [1-640454-2]  87.46,21.24 90 top
POWER:BAT+  [5,08/3]  74.37,2.87 0 top
POWER:BAT-  [5,08/3]  81.35,2.87 0 top
POWER:C53  100n  [C0603]  81.35,7.79 270 top
POWER:C54  100n  [C0603]  81.67,16.52 0 top
POWER:C55  100n  [C0603]  73.58,15.73 270 top
POWER:C56  100n  [C0603]  75,15.73 270 top
POWER:C57  10n  [C0603]  63.73,11.6 90 top
POWER:C58  100n  [C0603]  69.29,1.76 90 top
POWER:C59  1u  [C0603]  56.59,3.82 0 top
POWER:C60  18p  [C0603]  59.92,3.03 90 top
POWER:C61  33u  [C1206]  50.87,9.22 0 top
POWER:C62  10u  [C1206]  56.91,1.92 180 top
POWER:C63  10u  [C1206]  57.22,15.09 180 top
POWER:C64  18p  [C0603]  44.37,3.03 90 top
POWER:C65  33u  [C1206]  35.95,9.38 0 top
POWER:C66  10u  [C1206]  33.41,18.59 270 top
POWER:C67  100n  [C0603]  37.38,25.41 180 top
POWER:C68  100n  [C0603]  50.87,15.57 0 top
POWER:C69  100n  [C0603]  56.59,13.35 180 top
POWER:C70  10u  [C1206]  42.46,15.09 180 top
POWER:C71  1u  [C0603]  41.03,3.82 0 top
POWER:C72  10u  [C1206]  41.35,1.92 180 top
POWER:C73  100n  [C0603]  41.67,13.35 180 top
POWER:C74  33u  [C1206]  35.95,11.6 0 top
POWER:C75  100n  [C0603]  36.43,13.35 0 top
POWER:C76  33u  [C1206]  50.87,11.44 0 top
POWER:C77  33u  [C1206]  50.87,13.66 0 top
POWER:C78  33u  [C1206]  45.32,32.24 270 top
POWER:C79  33u  [C1206]  41.51,23.66 180 top
POWER:C80  100n  [C0603]  41.51,25.57 180 top
POWER:IC14  LTC2955CTS8-1  [SOT23-8]  77.86,15.73 0 top
POWER:IC16  LTC4231CMS-2  [MSOP-12]  77.86,8.43 270 top
POWER:IC17  INA226  [DGS_S-PDSO-G10]  65.16,1.6 270 top
POWER:IC18  LMR23630ADDA  [DDA_R-PDSO-G8]  57.54,8.58 0 top
POWER:IC19  LMR23630ADDA  [DDA_R-PDSO-G8]  42.46,8.58 0 top
POWER:IC20  LTC4415MSE  [MSOP-16P]  36.59,18.59 0 top
POWER:IC21  LT3080ST  [SOT223]  40.71,30.65 0 top
POWER:L8  7443251600  [WE-HCI]  50.87,4.3 0 top
POWER:L9  7443251600  [WE-HCI]  35.32,4.3 0 top
POWER:L10  470R  [L1206]  61.35,13.5 90 top
POWER:L11  470R  [L1206]  42.62,17.16 0 top
POWER:L12  470R  [L1206]  42.14,21.28 0 top
POWER:L13  120R  [L0603]  70.56,1.76 270 top
POWER:LED1  gr  [CHIP-LED0603]  82.62,78.12 0 top
POWER:Q7  FDD86367  [D-PAK_TO252AA]  68.02,12.71 0 top
POWER:R11  5k6  [R0603]  77.7,12.08 270 top
POWER:R27  40k2 1%  [R0603]  79.13,12.08 270 top
POWER:R28  24k 1%  [R0603]  80.56,12.08 270 top
POWER:R31  1M  [R0603]  76.27,12.08 90 top
POWER:R41  7k32 1%  [R0603]  81.67,14.93 0 top
POWER:R42  1M  [R0603]  77.86,18.11 0 top
POWER:R43  1k  [R0603]  63.73,8.43 270 top
POWER:R44  0R001  [R2512]  73.26,9.7 90 top
POWER:R46  0R002  [R2512]  67.22,5.09 180 top
POWER:R48  243k 1%  [R0603]  61.35,3.03 270 top
POWER:R49  22k1 1%  [R0603]  60.88,6.04 270 top
POWER:R50  88k7 1%  [R0603]  45.79,3.03 270 top
POWER:R51  22k1 1%  [R0603]  45.79,6.04 270 top
POWER:R52  22k1 1%  [R0603]  38.02,15.09 180 top
POWER:R53  88k7 1%  [R0603]  35,15.09 180 top
POWER:R54  330k  [R0603]  37.38,23.98 0 top
POWER:R55  1k  [R0603]  81.04,69.07 180 top

## Library data of the parts
CON:C15 DEBUG:C16 DEBUG:C17 DEBUG:C34-DEBUG:C38 DRIBBLER:C1-DRIBBLER:C4 DRIBBLER:C12 DRIBBLER:C21-DRIBBLER:C27 MOTOR1:C1-MOTOR1:C5 MOTOR1:C12 MOTOR1:C21-MOTOR1:C27 MOTOR2:C1-MOTOR2:C5 MOTOR2:C12 MOTOR2:C21-MOTOR2:C27 MOTOR3:C1-MOTOR3:C5 MOTOR3:C12 MOTOR3:C21-MOTOR3:C27 MOTOR4:C1-MOTOR4:C5 MOTOR4:C12 MOTOR4:C21-MOTOR4:C27 POWER:C53-POWER:C60 POWER:C64 POWER:C67-POWER:C69 POWER:C71 POWER:C73 POWER:C75 POWER:C80 = rcl; SPICEPREFIX: C
CON:EXT CON:IR CON:KD = con-hirose-df13
CON:IC1 CON:PAD1-CON:PAD4 CON:X1 DEBUG:IC10 DEBUG:S1 DRIBBLER:IC1 DRIBBLER:IC6 DRIBBLER:Q1-DRIBBLER:Q3 DRIBBLER:Q5 DRIBBLER:X1 MOTOR1:IC1 MOTOR1:IC6 MOTOR1:IC11 MOTOR1:Q1-MOTOR1:Q3 MOTOR1:Q5 MOTOR2:IC1 MOTOR2:IC6 MOTOR2:IC11 MOTOR2:Q1-MOTOR2:Q3 MOTOR2:Q5 MOTOR3:IC1 MOTOR3:IC6 MOTOR3:IC11 MOTOR3:Q1-MOTOR3:Q3 MOTOR3:Q5 MOTOR4:IC1 MOTOR4:IC6 MOTOR4:IC11 MOTOR4:Q1-MOTOR4:Q3 MOTOR4:Q5 POWER:BAT+ POWER:BAT- POWER:IC14 POWER:IC16-POWER:IC21 POWER:L8 POWER:L9 POWER:Q7 = TIGERs
CON:Q8 CON:Q17 = transistor-small-signal
CON:R1 CON:R12 CON:R40 DEBUG:R12-DEBUG:R15 DEBUG:R24-DEBUG:R26 DRIBBLER:R1-DRIBBLER:R6 DRIBBLER:R9 DRIBBLER:R17-DRIBBLER:R20 DRIBBLER:R22 DRIBBLER:R23 MOTOR1:R1-MOTOR1:R6 MOTOR1:R9 MOTOR1:R17-MOTOR1:R20 MOTOR1:R22 MOTOR1:R23 MOTOR2:R1-MOTOR2:R6 MOTOR2:R9 MOTOR2:R17-MOTOR2:R20 MOTOR2:R22 MOTOR2:R23 MOTOR3:R1-MOTOR3:R6 MOTOR3:R9 MOTOR3:R17-MOTOR3:R20 MOTOR3:R22 MOTOR3:R23 MOTOR4:R1-MOTOR4:R6 MOTOR4:R9 MOTOR4:R17-MOTOR4:R20 MOTOR4:R22 MOTOR4:R23 POWER:R11 POWER:R27 POWER:R28 POWER:R31 POWER:R41-POWER:R44 POWER:R46 POWER:R48-POWER:R55 = rcl; SPICEPREFIX: R
CON:RN1 CON:RN2 CON:RN7-CON:RN9 DEBUG:RN3-DEBUG:RN5 DRIBBLER:RN1 DRIBBLER:RN6 MOTOR1:RN1 MOTOR1:RN2 MOTOR1:RN6 MOTOR2:RN1 MOTOR2:RN2 MOTOR2:RN6 MOTOR3:RN1 MOTOR3:RN2 MOTOR3:RN6 MOTOR4:RN1 MOTOR4:RN2 MOTOR4:RN6 = resistor-dil; OC_FARNELL: unknown; OC_NEWARK: unknown
CON:SG1 = buzzer; OC_FARNELL: unknown; OC_NEWARK: unknown
DEBUG:IC8 = 74xx-little-de
DEBUG:IC9 = microchip; OC_FARNELL: unknown; OC_NEWARK: unknown
DEBUG:L3 DRIBBLER:L1 DRIBBLER:L6 MOTOR1:L1 MOTOR1:L6 MOTOR2:L1 MOTOR2:L6 MOTOR3:L1 MOTOR3:L6 MOTOR4:L1 MOTOR4:L6 POWER:L13 = rc-master-smd
DEBUG:Q4 = TIGERs; MPN: CSTCR6M00G53-R0; OC_FARNELL: 1170434; OC_NEWARK: 25M8759
DRIBBLER:C5-DRIBBLER:C11 DRIBBLER:C13 DRIBBLER:C14 DRIBBLER:C157 MOTOR1:C6-MOTOR1:C11 MOTOR1:C13-MOTOR1:C15 MOTOR1:C157 MOTOR2:C6-MOTOR2:C11 MOTOR2:C13-MOTOR2:C15 MOTOR2:C157 MOTOR3:C6-MOTOR3:C11 MOTOR3:C13-MOTOR3:C15 MOTOR3:C157 MOTOR4:C6-MOTOR4:C11 MOTOR4:C13-MOTOR4:C15 MOTOR4:C157 = rcl; PARTNR: C3225X5R1H106M250AB; SPICEPREFIX: C; VMAX: 50V
DRIBBLER:LED2 MOTOR1:LED2 MOTOR2:LED2 MOTOR3:LED2 MOTOR4:LED2 = led; SPICEPREFIX: D
DRIBBLER:R16 MOTOR1:R16 MOTOR2:R16 MOTOR3:R16 MOTOR4:R16 = rcl; POWER: 1W; SPICEPREFIX: R
DRIBBLER:SWCLK DRIBBLER:SWDIO MOTOR1:SWCLK MOTOR1:SWDIO MOTOR2:SWCLK MOTOR2:SWDIO MOTOR3:SWCLK MOTOR3:SWDIO MOTOR4:SWCLK MOTOR4:SWDIO = testpad
MOTOR1:C16 MOTOR2:C16 MOTOR3:C16 MOTOR4:C16 = TIGERs; PARTNR: EEU-FM1H471B; VMAX: 50V
MOTOR1:X2 MOTOR2:X2 MOTOR3:X2 MOTOR4:X2 = TIGERs; MANUFACTURER_PART_NUMBER: 16404542; VENDOR: TE Connectivity
POWER:C61 POWER:C65 POWER:C74 POWER:C76-POWER:C79 = rcl; SPICEPREFIX: C; VOLTAGE: 25V
POWER:C62 POWER:C63 POWER:C66 POWER:C70 POWER:C72 = rcl; SPICEPREFIX: C; VOLTAGE: 50V
POWER:L10-POWER:L12 = rc-master-smd; IMAX: 4A
POWER:LED1 = led